# Altium PCB Eros_PCB.PcbDoc
Units mil, origin at the board's own origin, x right, y up, seen from the top; angles counter-clockwise.
Board outline 3205 x 3285 mil, 2 copper layers (Top Layer, Bottom Layer); 38 components, 28 nets, 99 pads, 11 vias.
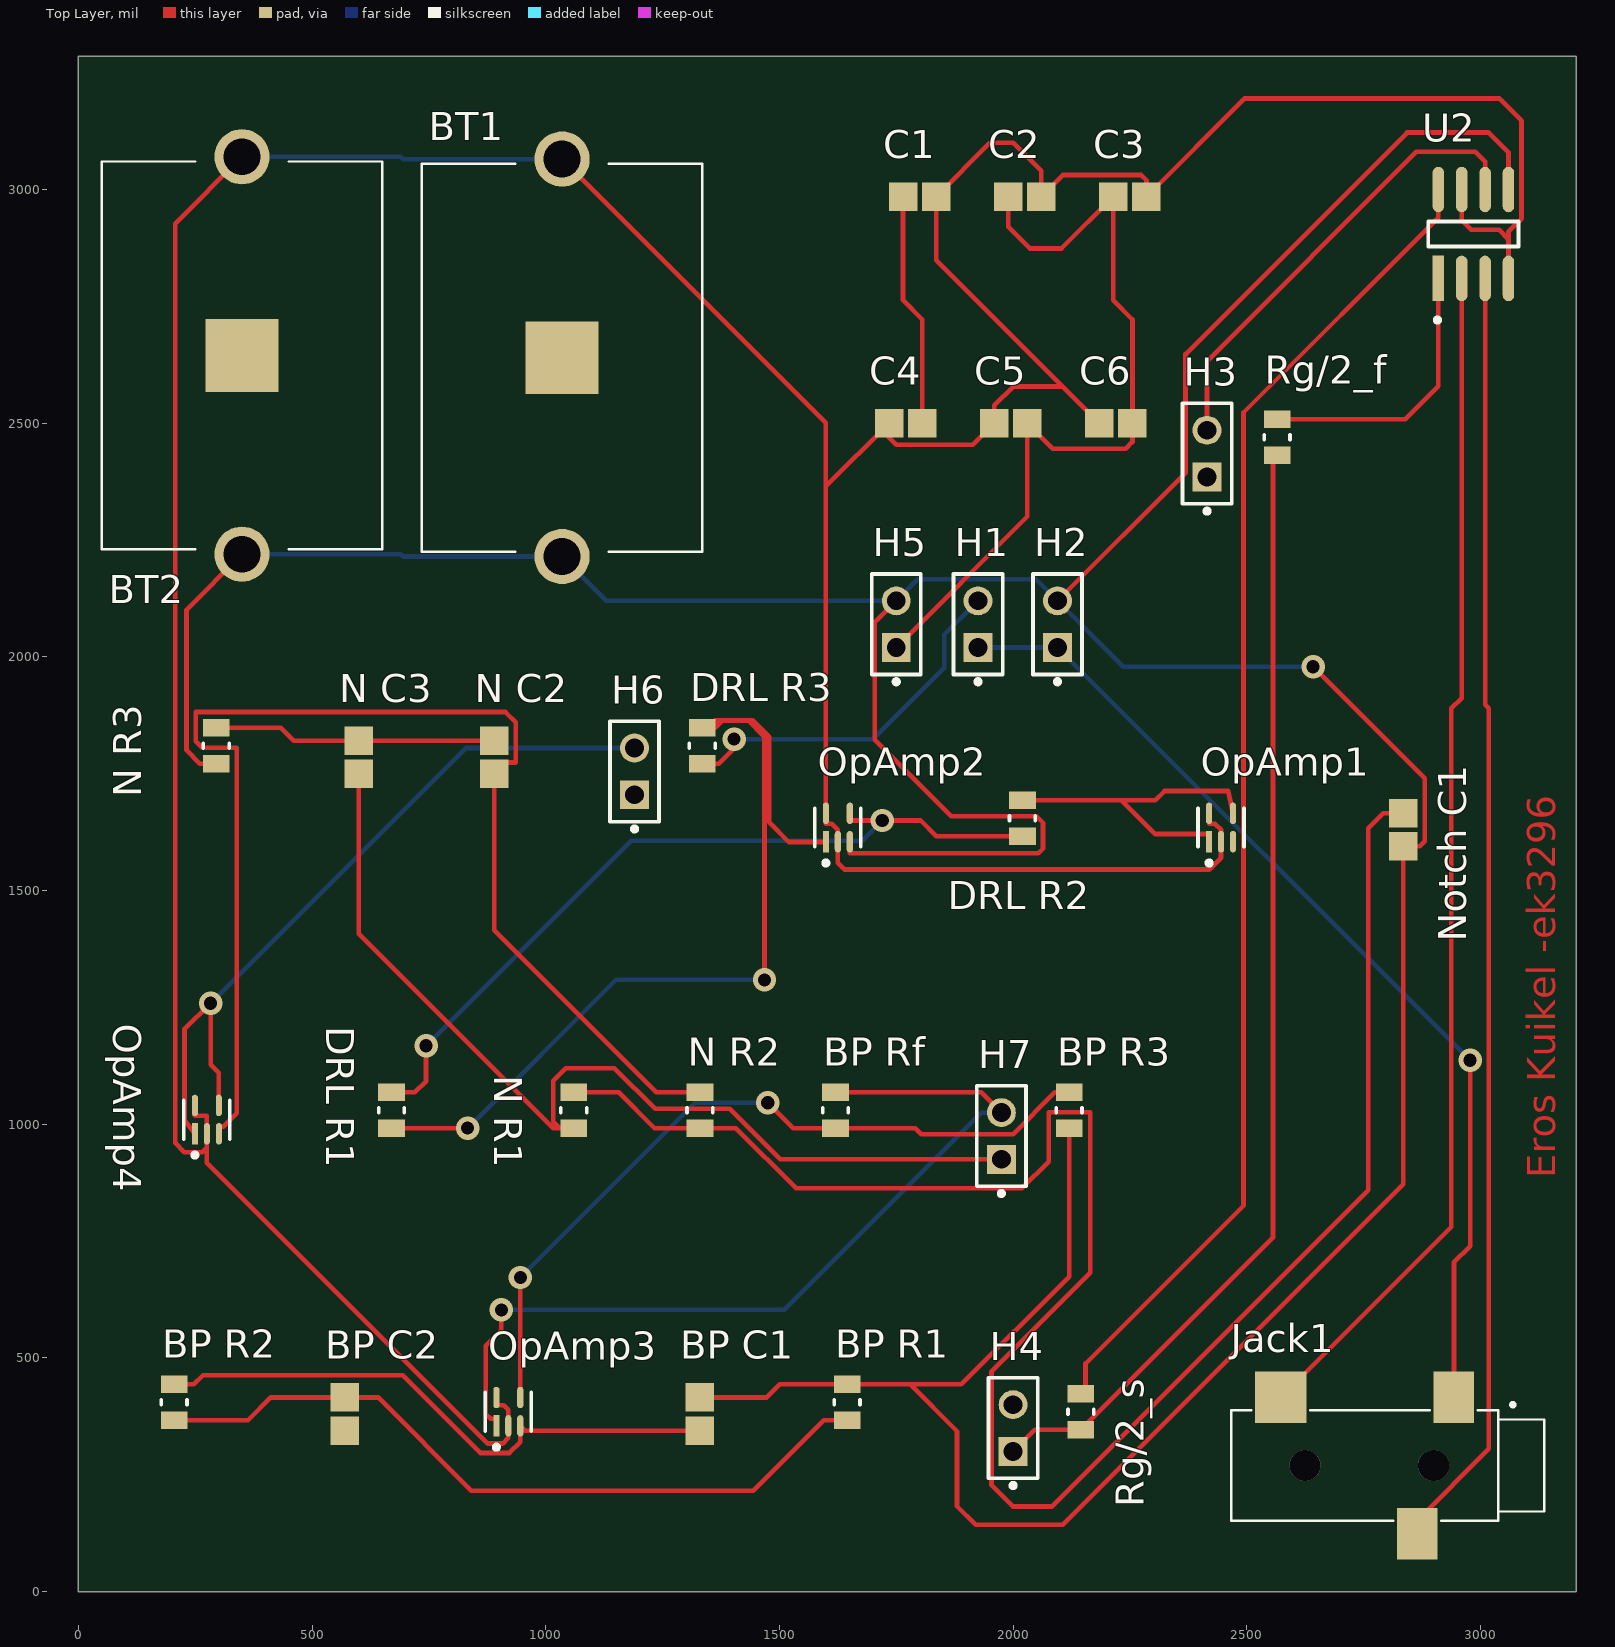
[diagram p0: Top Layer view]
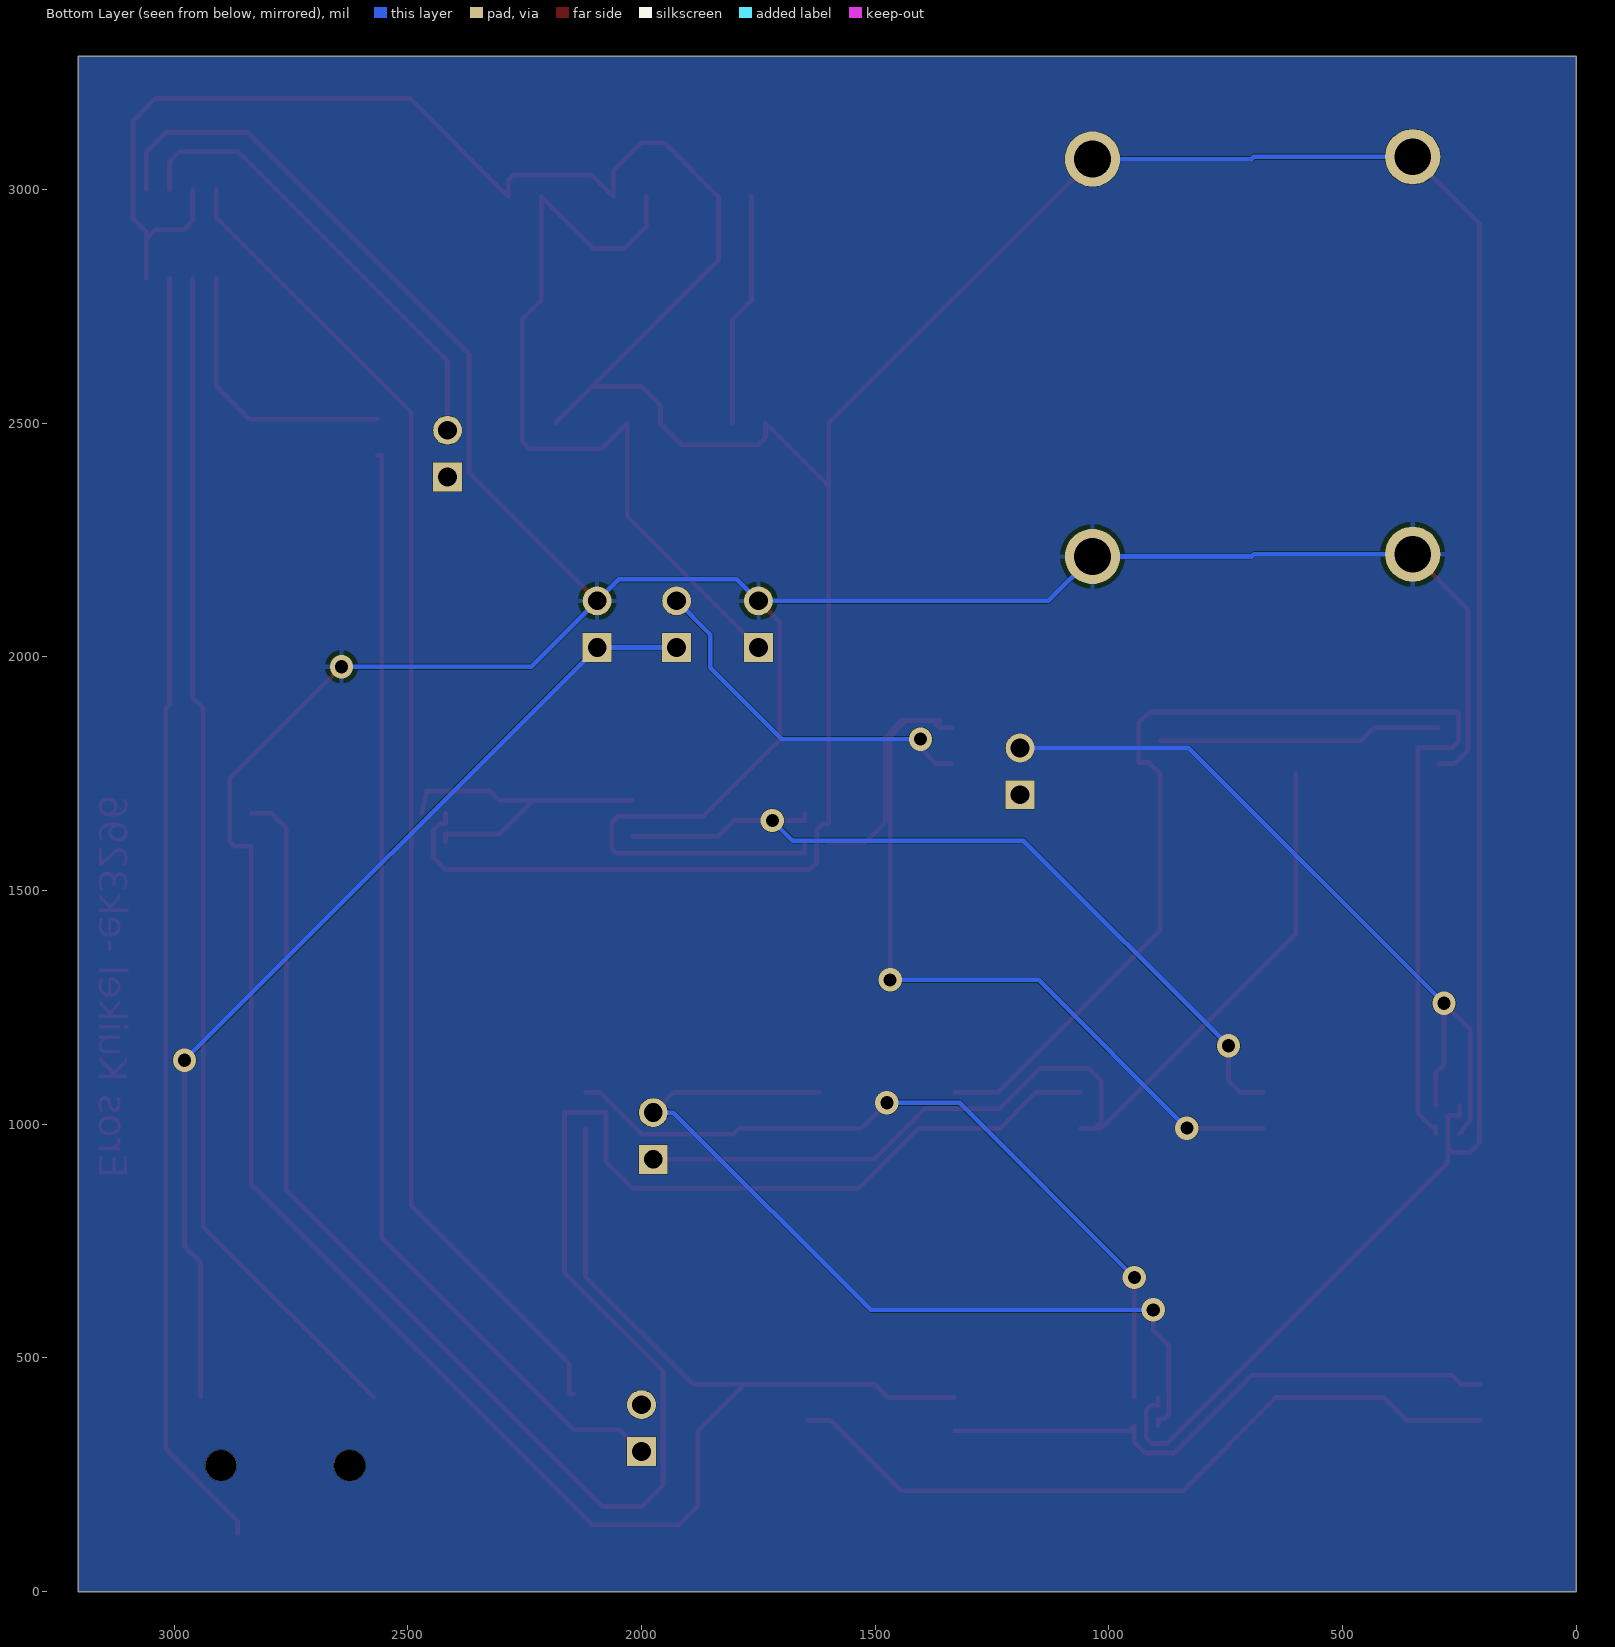
[diagram p1: Bottom Layer view, seen from below]
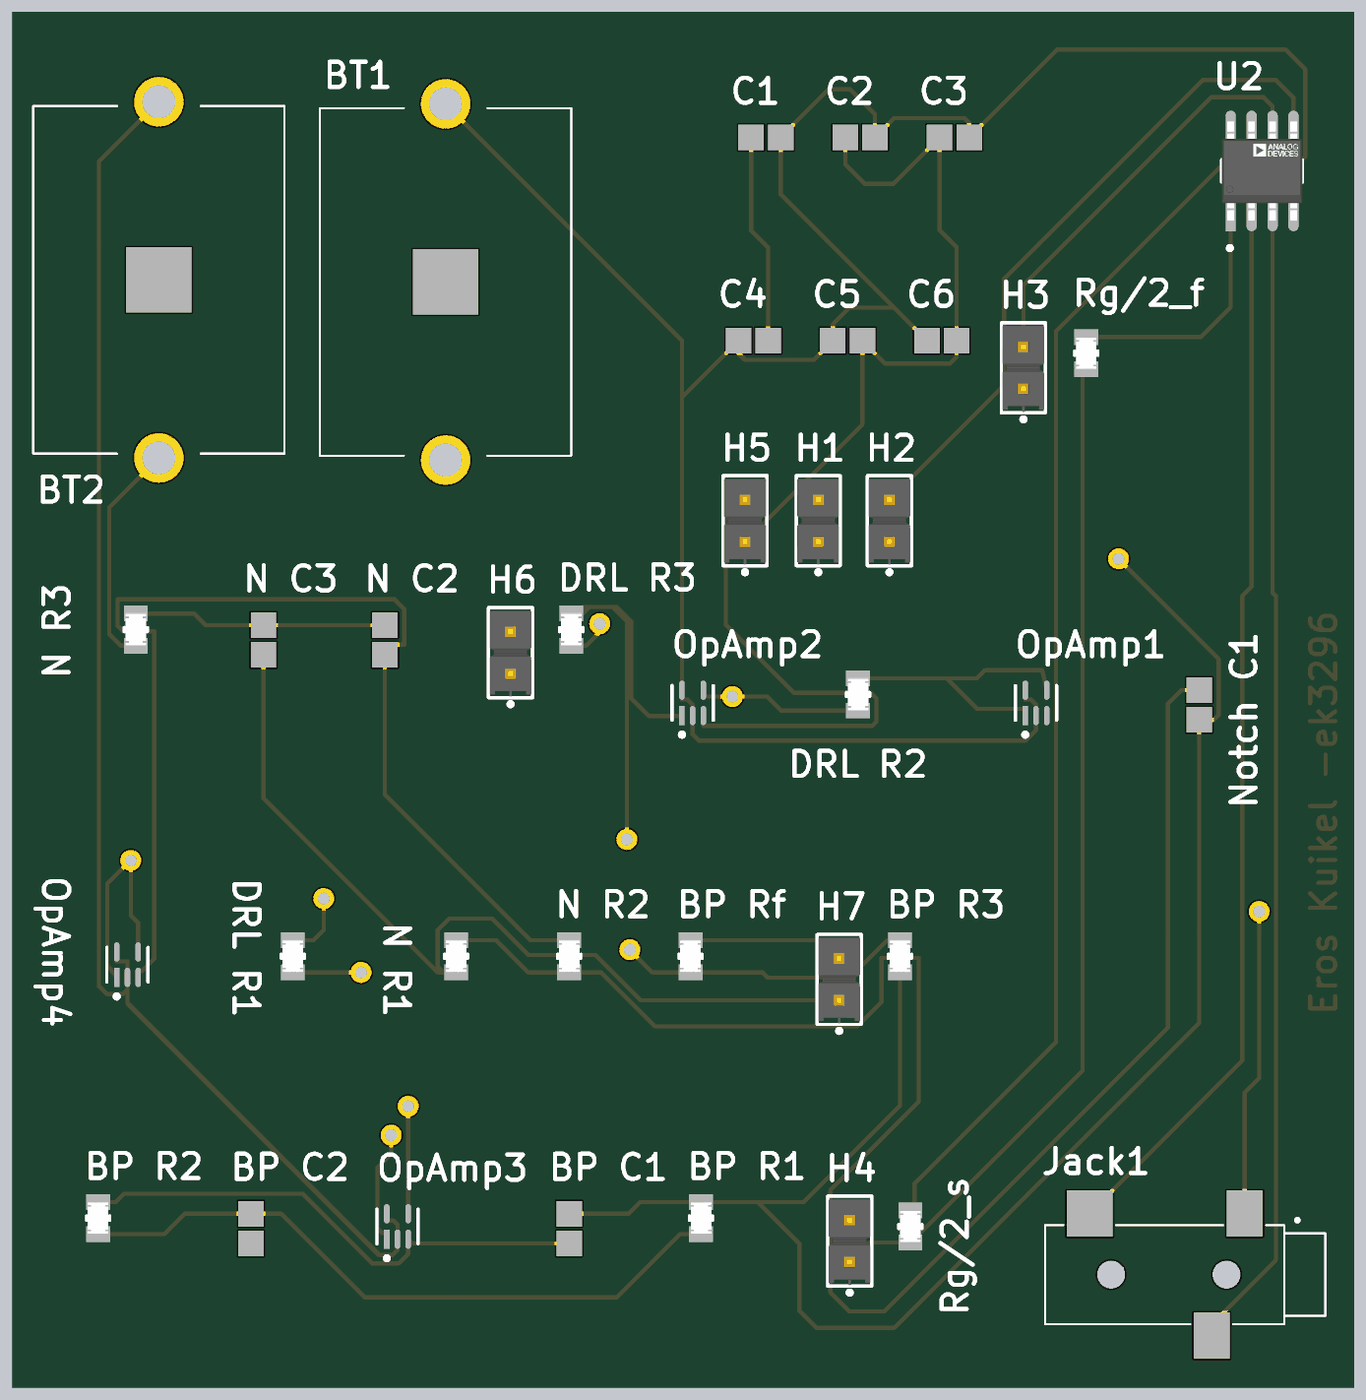
[diagram p2: 3D render of the assembled board from above, using the file's embedded part models]

## Layer stack, top to bottom
Top Solder: solder mask 0.4, Solder Resist, Dk 3.5
Top Layer: signal copper 1.4
Dielectric 1: dielectric 12.6, FR-4, Dk 4.8
Bottom Layer: signal copper 1.4
Bottom Solder: solder mask 0.4, Solder Resist, Dk 3.5

## Board outline
0,0 3205,0 3205,3285 0,3285

## Design rules (kind name [scope] priority, off if disabled: settings)
Clearance [All] p1: gap=0.5 ignorepadtopadclearanceinfootprint=FALSE
MinimumSolderMaskSliver [All] p1: minsoldermaskwidth=0.5
PolygonConnect [All] p1: connectstyle=Relief reliefconductorwidth=10 reliefentries=4 polygonreliefangle="90 Angle" airgapwidth=10
RoutingVias [All] p1: holewidth=28 width=50 viastyle="Through Hole" minholewidth=28 minwidth=50 maxholewidth=28 maxwidth=50
SilkToSolderMaskClearance [IsPad] p1: minsilkscreentomaskgap=5 clearancetoexposedcopper=TRUE
SolderMaskExpansion [All] p1: expansion=4 istentingtop=FALSE
Width [All] p1: maxlimit=10 minlimit=10 preferedwidth=10
28 further rules are at their usual default settings.

## Components (designator, comment, footprint, x,y, rotation, side; value= is the part's Value field where it differs from the comment)
"BP C1" "08052U220GAT2A" CAPC2013X115X51ML20T26 1330,380 r90 top
"BP C2" "08052U220GAT2A" CAPC2013X115X51ML20T26 570,380 r90 top
"BP R1" "CRCW08053K30FKEA" FP-CRCW0805-e3-MFG 1645,405 r90 top
"BP R2" "CRCW08053K30FKEA" FP-CRCW0805-e3-MFG 205,405 r90 top
"BP R3" "CRCW08053K30FKEA" FP-CRCW0805-e3-MFG 2120,1030 r90 top
"BP Rf" "CRCW08053K30FKEA" FP-CRCW0805-e3-MFG 1620,1030 r90 top
BT1 "BK-913-TR" BAT_BK-913-TR 1035,2640 r270 top
BT2 "BK-913-TR" BAT_BK-913-TR 350,2645 r90 top
C1 "08052U220GAT2A" CAPC2013X115X51ML20T26 1800,2985 r0 top
C2 "08052U220GAT2A" CAPC2013X115X51ML20T26 2025,2985 r0 top
C3 "08052U220GAT2A" CAPC2013X115X51ML20T26 2250,2985 r0 top
C4 "08052U220GAT2A" CAPC2013X115X51ML20T26 1770,2500 r0 top
C5 "08052U220GAT2A" CAPC2013X115X51ML20T26 1995,2500 r0 top
C6 "08052U220GAT2A" CAPC2013X115X51ML20T26 2220,2500 r0 top
"DRL R1" "CRCW08053K30FKEA" FP-CRCW0805-e3-MFG 670,1030 r90 top
"DRL R2" "CRCW08053K30FKEA" FP-CRCW0805-e3-MFG 2020,1655 r90 top
"DRL R3" "CRCW08053K30FKEA" FP-CRCW0805-e3-MFG 1335,1810 r90 top
H1 "TSW-102-07-L-S" FP-TSW-102-07-L-S-MFG 1925,2070 r90 top
H2 "TSW-102-07-L-S" FP-TSW-102-07-L-S-MFG 2095,2070 r90 top
H3 "TSW-102-07-L-S" FP-TSW-102-07-L-S-MFG 2415,2435 r90 top
H4 "TSW-102-07-L-S" FP-TSW-102-07-L-S-MFG 2000,350 r90 top
H5 "TSW-102-07-L-S" FP-TSW-102-07-L-S-MFG 1750,2070 r90 top
H6 "TSW-102-07-L-S" FP-TSW-102-07-L-S-MFG 1190,1755 r90 top
H7 "TSW-102-07-L-S" FP-TSW-102-07-L-S-MFG 1975,975 r90 top
Jack1 "SJ-3523-SMT-TR" CUI_SJ-3523-SMT-TR 2900,270 r180 top
"N C2" "08052U220GAT2A" CAPC2013X115X51ML20T26 890,1785 r90 top
"N C3" "08052U220GAT2A" CAPC2013X115X51ML20T26 600,1785 r90 top
"N R1" "CRCW08053K30FKEA" FP-CRCW0805-e3-MFG 1060,1030 r90 top
"N R2" "CRCW08053K30FKEA" FP-CRCW0805-e3-MFG 1330,1030 r90 top
"N R3" "CRCW08053K30FKEA" FP-CRCW0805-e3-MFG 295,1810 r90 top
"Notch C1" "08052U220GAT2A" CAPC2013X115X51ML20T26 2835,1630 r90 top
OpAmp1 "TLV521DCKT" FP-DCK0005A-IPC_C 2445,1635 r90 top
OpAmp2 "TLV521DCKT" FP-DCK0005A-IPC_C 1625,1635 r90 top
OpAmp3 "TLV521DCKT" FP-DCK0005A-IPC_C 920,385 r90 top
OpAmp4 "TLV521DCKT" FP-DCK0005A-IPC_C 275,1010 r90 top
Rg/2_f "CRCW08053K30FKEA" FP-CRCW0805-e3-MFG 2565,2470 r90 top
Rg/2_s "CRCW08053K30FKEA" FP-CRCW0805-e3-MFG 2145,385 r90 top
U2 "AD620ARZ-REEL7" FP-R-8-IPC_A 2985,2905 r90 top

## Footprints (in the part's own frame and the unit in brackets; to place one, negate y for a bottom-side part, rotate by r counter-clockwise, add the part's x,y. Pads: shape width x height; smd on the part's side, far side on the other; paste and mask are expansions set on the pad)
BAT_BK-913-TR [mm]
  round 3 hole 2: 1(-10.8,0) 2(10.8,0)
  rect 3.96x3.96 smd: 3(0,0)
  silkscreen extent -10.54,-7.62 10.54,7.62
CAPC2013X115X51ML20T26 [mm] "Chip Capacitor, 2-Leads, Body 2.01x1.25mm, IPC Low Density"
  rect 1.55x1.55 smd: 1(-0.9,0) 2(0.9,0)
  body extent -1.11,-0.72 1.1,0.72, height 1.15
CUI_SJ-3523-SMT-TR [mm]
  rect 2.2x2.8 smd: 1(-1.1,-3.7) 3(0.9,3.7)
  rect 2.8x2.8 smd: 2(8.3,-3.7)
  round 1.7 hole 1.7 unplated: ""(0,0) ""(7,0)
  silkscreen extent -6,-3.4 11,3
FP-CRCW0805-e3-MFG [mm]
  rect 0.95x1.45 smd paste+0 mask+0: 1(-0.975,0) 2(0.975,0)
  silkscreen extent -0.13,-0.7 0.13,0.7, body extent -1.55,-0.82 1.55,0.82, height 0.25
FP-DCK0005A-IPC_C [mm]
  rect 1.164x0.336 smd paste+0 mask+0: 1(-0.77,0.65)
  rrect100% 1.164x0.336 smd paste+0 mask+0: 2(-0.77,0) 3(-0.77,-0.65) 4(0.77,-0.65) 5(0.77,0.65)
  silkscreen extent -2.05,-1.25 1.05,1.25
FP-R-8-IPC_A [mil]
  rect 97.4x24.49 smd paste+0 mask+0: 1(-95.12,75)
  rrect100% 97.4x24.49 smd paste+0 mask+0: 2(-95.12,25) 3(-95.12,-25) 4(-95.12,-75) 5(95.12,-75) 6(95.12,-25) 7(95.12,25) 8(95.12,75)
  silkscreen extent -189,-96 27,96, body extent -164,-116 164,116, height 10
FP-TSW-102-07-L-S-MFG [mm]
  rect 1.57x1.57 hole 1.02 paste-1000 mask+0: 1(-1.27,0)
  round 1.57 hole 1.02 paste-1000 mask+0: 2(1.27,0)
  silkscreen extent -3.25,-1.34 2.73,1.34, body extent -2.83,-1.44 2.83,1.44, height 0.25

## Part data
"BP C1" "BP C2" C1 C2 C3 C4 C5 C6 "N C2" "N C3" "Notch C1": library part CMP-2007-04866-1, Manufacturer="AVX Interconnect / Elco", Part Number=08052U220GAT2A
"BP R1" "BP R2" "BP R3" "BP Rf" "DRL R1" "DRL R2" "DRL R3" "N R1" "N R2" "N R3" Rg/2_f Rg/2_s: library part CMP-2001-03876-2, "RES Thick Film, 3.3kΩ, 1%, 0.125W, 100ppm/°C, 0805", Case Code (Imperial)=0805, Case Code (Metric)=2012, Max Operating Temperature=155°C, Max Power Dissipation=125mW, Min Operating Temperature=-55°C, Package Quantity=10, Resistance=3.3kR, Temperature Coefficient=100ppm/°C, Tolerance=1%, Voltage Rating=150V, Case/Package=0805, Composition="Thick Film", Contact Plating=Tin, Depth=1.25mm, Features="Automotive AEC-Q200", Height=0.45mm, Lead Free="Lead Free", Length=2mm, Military Standard=Not, Mount="Surface Mount", Number of Terminations=2, Packaging="Tape and Reel", Power Rating=125mW, Radiation Hardening=No, Termination=SMD/SMT, Voltage Rating (DC)=150V, Weight=0.000194oz, Width=1.25mm
BT1 BT2: "Battery Retainer Coin, 20.0mm 1 Cell PC Pin", Package="MSOP-12 MPD", Digi-Key_Part_Number=BK-913-CT-ND, MF="MPD (Memory", MP=BK-913-TR, SnapEDA_Link=https://www.snapeda.com/parts/BK-913-TR/MPD%20(Memory%20Protection%20Devices)/view-part/576523/?ref=snap
H1 H2 H3 H4 H5 H6 H7: library part CMP-02766-001428-1, "CONN HEADER VERT 2POS 2.54MM", Color=Black, Current Rating=7.6A, Max Operating Temperature=125°C, Max Voltage Rating (AC)=550V, Min Operating Temperature=-55°C, Package Quantity=1, Connector Type="Male Pin", Contact Material=Bronze, Contact Mating Length=0.23inch, Contact Plating=Gold, Contact Type="Male Pin", Depth=2.54mm, Gender=Male, Housing Color=Black, Housing Material=Polyester, Lead Free="Lead Free", Length=5.08mm, Max Current Rating=7.6A, Mount="Through Hole", Number of Contacts=2, Number of Positions=2, Number of Rows=1, Orientation=Straight, Packaging=Bulk, Pitch=2.54mm, Radiation Hardening=No, REACH SVHC="No SVHC", RoHS Compliant=Yes, Series=TSW, Termination=Solder, Voltage Rating=550V, Width=2.54mm
Jack1: "<b>Audio Jack Connector</b> 3.5 mm Low Profile Surface Mount Stereo Jack, 3 Pin Right-Angle", Package=None, Availability=Unavailable, MP=SJ-3523-SMT-TR, Price=None
OpAmp1 OpAmp2 OpAmp3 OpAmp4: library part CMP-04895-000072-1, "IC CMOS 1 CIRCUIT SC70-5", Case/Package=SC, Input Bias Current=1pA, Input Offset Voltage (Vos)=100uV, Max Operating Temperature=125°C, Min Operating Temperature=-40°C, Operating Supply Current=350nA, Output Current per Channel=12mA, Bandwidth=6kHz, Gain Bandwidth Product=6kHz, Lead Free="Lead Free", Mount="Surface Mount", Number of Amplifiers=1, Number of Channels=1, Number of Circuits=1, Number of Pins=5, Packaging="Cut Tape", REACH SVHC="No SVHC", Slew Rate=2.5V/µs
U2: library part CMP-09116-000354-1, "IC INST AMP 1 CIRCUIT 8SOIC", Case/Package=SOIC, Dual Supply Voltage=15V, Input Bias Current=500pA, Input Offset Voltage (Vos)=30mV, Input Resistance=10GR, Max Dual Supply Voltage=18V, Max Operating Temperature=125°C, Max Power Dissipation=650mW, Min Dual Supply Voltage=2.3V, Min Operating Temperature=-55°C, Min Supply Voltage=4.6V, Nominal Supply Current=900uA, Operating Supply Current=1.3mA, Output Current per Channel=18mA, Package Quantity=1, Power Supply Rejection Ratio (PSRR)=140dB, -3db Bandwidth=1MHz, Bandwidth=800kHz, Common Mode Rejection Ratio=93dB, Contact Plating=Tin, Lead Free="Contains Lead", Mount="Surface Mount", Number of Channels=1, Number of Circuits=1, Number of Elements=1, Number of Pins=8, Operating Supply Voltage=18V, Packaging="Tape and Reel", Power Dissipation=650mW, Radiation Hardening=No, RoHS Compliant=Yes, Series=-, Slew Rate=1.2V/µs, Supply Current=900uA

## Via types
v1: diameter 50, hole 28, Top Layer to Bottom Layer, 11 vias

## Nets (pads, with @x,y where several pads share a name; then routed paths per layer and width w, separated by ;. In a path a pad name is that pad's centre, name@x,y a point inside that pad or via, vN(x,y) a via of type N, cw(c..) or ccw(c..) an arc to the next point about the centre after c; other vN are vias at no path point)
"Bandpass input": H3.1
GND: "BP C1.2" "BP R1.2" "BP R3.1" "N R3.1" "Notch C1.1" BT1.2 BT2.1 H2.2 H5.2 OpAmp2.3 U2.5 | length 9883
  Top Layer w10: 295,1771.61 259.84,1771.61 231.46,1800 231.46,2101.26 BT2.1 ; 1330,415.43 1473,415.43 1500.95,443.39 1645,443.39 1779.61,443.39 ; OpAmp2.3 1650.59,1580 2054,1580 2064,1590 2064,1645 2050,1659 1868,1659 1704,1823 1704,2074 H5.2 ; H2.2 2369,2394 2369,2648 2843,3122 3018,3122 3060,3080 U2.5 ; 2120,991.61 2120,674 1889.39,443.39 1779.61,443.39 ; v1(2642,1979) 2881,1740 2881,1605.57 2870,1594.57 2835,1594.57 2835,872 2106,143 1920,143 1880,183 1880,343 1779.61,443.39
  Bottom Layer w10: BT2.1 690,2219.8 695,2214.8 BT1.2 1129.8,2120 H5.2 1796,2166 2049,2166 H2.2 2236,1979 v1(2642,1979)
"Input of Bandpass": "BP C2.1"
"Input of DRL": "DRL R3.1" H1.2 | length 787.3
  Top Layer w10: 1335,1771.61 1370,1771.61 1403,1804.61 v1(1403,1824)
  Bottom Layer w10: v1(1403,1824) 1700,1824 1853,1977 1853,2048 H1.2
"Input of Notch": "N C3.1" "N R1.1" H7.1 | length 2132.4
  Top Layer w10: 600,1749.57 600,1407.61 1016,991.61 1030,991.61 ; 1060,991.61 1030,991.61 ; H7.1 1502,925 1394,1033 1234,1033 1147,1120 1043,1120 1016,1093 1016,1005.61 1030,991.61
"NetBP C1_1": "BP C1.1" "BP R2.2" OpAmp3.3 | length 1250.5
  Top Layer w10: 205,443.39 247,443.39 266.61,463 694,463 860.23,296.77 922.36,296.77 945.59,320 OpAmp3.3 955.71,344.57 1330,344.57
"NetBP C2_2": "BP C2.2" "BP R1.1" "BP R2.1" | length 1605.2
  Top Layer w10: 205,366.61 363,366.61 411.82,415.43 570,415.43 641.57,415.43 841,216 1444.39,216 1595,366.61 1645,366.61
"NetBP R3_2": "BP R3.2" "BP Rf.1" OpAmp3.4 | length 1650.9
  Top Layer w10: OpAmp3.4 v1(945.59,672.18) ; v1(1475,1046) 1529.39,991.61 1620,991.61 1791,991.61 1803.61,979 1999.97,979 2089.35,1068.39 2120,1068.39
  Bottom Layer w10: v1(945.59,672.18) 1319.41,1046 v1(1475,1046)
"NetBP Rf_2": "BP Rf.2" H7.2 OpAmp3.1 | length 1896.3
  Top Layer w10: OpAmp3.1 894.41,370 882,370 872,380 872,526 905,559 v1(905,603) ; 1620,1068.39 1931.61,1068.39 H7.2
  Bottom Layer w10: v1(905,603) 1510,603 1932,1025 H7.2
NetC1_1: C1.1 C4.2 | length 501.9
  Top Layer w10: C1.1 1764.57,2762.87 1805.43,2722 C4.2
NetC2_1: C2.1 C3.1 C5.2 C6.2 H5.1 | length 1746.8
  Top Layer w10: H5.1 2030.43,2300.43 C5.2 2085,2445.43 2240.87,2445.43 2255.43,2460 C6.2 2255.43,2722 2214.57,2762.87 C3.1 2103.57,2874 2035.57,2874 1989.57,2920 C2.1
"NetDRL R1_1": "DRL R1.1" "DRL R3.2" OpAmp2.1 | length 2071.9
  Top Layer w10: 670,991.61 v1(833,991.61) ; 1335,1848.39 1362,1848.39 ; v1(1468,1309) 1468,1829 1433,1864 1378.35,1864 ; OpAmp2.1 1599.41,1604 1520,1604 1478,1646 1478,1828.78 1442.74,1864.04 1378.39,1864.04 1378.35,1864 ; 1362,1848.39 1362.74,1848.39 1378.35,1864 ; 1362,1848.39 1362,1864 1378.35,1864
  Bottom Layer w10: v1(833,991.61) 1150.39,1309 v1(1468,1309)
"NetDRL R1_2": "DRL R1.2" "DRL R2.1" OpAmp2.4 | length 1733.8
  Top Layer w10: 670,1068.39 720,1068.39 744,1092.39 v1(744,1168) ; OpAmp2.4 1650.59,1650 v1(1720,1650) 1802.61,1650 1836,1616.61 2020,1616.61
  Bottom Layer w10: v1(744,1168) 1183,1607 1677,1607 v1(1720,1650)
"NetDRL R2_2": "DRL R2.2" OpAmp1.1 OpAmp1.4 | length 731.1
  Top Layer w10: 2020,1693.39 2231.61,1693.39 ; OpAmp1.1 2419.41,1621 2304,1621 2231.61,1693.39 ; OpAmp1.4 2460,1713 2324,1713 2304.39,1693.39 2231.61,1693.39
NetH3_2: H3.2 U2.6 | length 997.1
  Top Layer w10: H3.2 2415,2633 2863,3081 2989,3081 3010,3060 U2.6
NetH4_1: H4.1 Rg/2_f.1 Rg/2_s.1 | length 2428.5
  Top Layer w10: H4.1 2046.61,346.61 Rg/2_s.1 2556,757.61 2556,2431.61 Rg/2_f.1
NetH6_2: H6.2 OpAmp4.1 OpAmp4.4 | length 1669.2
  Top Layer w10: OpAmp4.1 227,1009 227,1203 v1(283,1259) 283,1127.59 300.59,1110 OpAmp4.4
  Bottom Layer w10: v1(283,1259) 829,1805 H6.2
NetJack1_2: Jack1.2 U2.2 | length 2554.4
  Top Layer w10: Jack1.2 2937.8,780.24 2937.8,1889.74 2960,1911.94 U2.2
NetJack1_3: Jack1.3 U2.3 | length 2752.4
  Top Layer w10: Jack1.3 2864.57,152 3018,305.43 3018,1889.74 3010,1897.74 U2.3
"NetN C2_1": "N C2.1" "N R2.2" OpAmp4.3 | length 2757.1
  Top Layer w10: OpAmp4.3 300.59,995 310,995 339,1024 339,1806 265.46,1806 251.46,1820 251.46,1882.09 913.91,1882.09 936,1860 936,1774 914.43,1774 890,1749.57 890,1415 1236.61,1068.39 1330,1068.39
"NetN C2_2": "N C2.2" "N C3.2" "N R3.2" | length 606.6
  Top Layer w10: 295,1848.39 433,1848.39 460.95,1820.43 600,1820.43 890,1820.43
"NetN R1_2": "N R1.2" "N R2.1" "Notch C1.2" | length 4173
  Top Layer w10: 1060,1068.39 1156,1068.39 1232.77,991.61 1330,991.61 1407,991.61 1535.61,863 2019,863 2076,920 2076,1026 2165,1026 2165,682.6 1954,471.6 1954,228 2000,182 2083,182 2760,859 2760,1633 2792.43,1665.43 2835,1665.43
NetRg/2_f_2: Rg/2_f.2 U2.1 | length 605.1
  Top Layer w10: Rg/2_f.2 2839.39,2508.39 2910,2579 U2.1
NetRg/2_s_2: Rg/2_s.2 U2.8 | length 2899.5
  Top Layer w10: Rg/2_s.2 2155,423.39 2155,488 2493,826 2493,2523 2910,2940 U2.8
"Ouput of DRL": H4.2
"Output of DRL": OpAmp1.3
"Right Leg": H1.1 H2.1 Jack1.1 | length 2154.5
  Top Layer w10: Jack1.1 2943.31,704.31 2978,739 v1(2978,1137)
  Bottom Layer w10: H1.1 H2.1 v1(2978,1137)
Vcc+: BT1.1 BT2.2 C1.2 C2.2 C3.2 C4.1 C5.1 C6.1 OpAmp1.2 OpAmp1.5 OpAmp2.2 OpAmp2.5 OpAmp3.2 OpAmp3.5 OpAmp4.2 OpAmp4.5 U2.4 U2.7 | length 10176.8
  Top Layer w10: OpAmp4.5 249.41,1018 275,1018 OpAmp4.2 275,950 ; BT2.2 207,2927.2 207,960 227,940 265,940 275,950 ; OpAmp3.5 894.41,399 910,399 920,389 OpAmp3.2 920,329 907.77,316.77 876.23,316.77 275,918 275,950 ; BT1.1 1599.41,2500.79 1599.41,2364.84 ; C6.1 2106,2578.57 ; OpAmp1.5 2419.41,1643 2432,1643 2445,1630 OpAmp1.2 2445,1570 2420,1545 1640,1545 1625,1560 OpAmp2.2 1625,1630 1612,1643 1599.41,1643 OpAmp2.5 1599.41,2364.84 ; U2.7 2960,2934 2980,2914 3040,2914 3060,2894 ; U2.4 3060,2894 ; 1599.41,2364.84 C4.1 1734.57,2469.43 1750,2454 1913.57,2454 C5.1 1959.57,2538.13 2000,2578.57 2106,2578.57 ; 2106,2578.57 1835.43,2849.13 C1.2 1950.43,3100 2000.43,3100 2060.43,3040 C2.2 2106.43,3031 2274.43,3031 2285.43,3020 C3.2 2495.43,3195 3040,3195 3088,3147 3088,2938 3060,2910 3060,2894
  Bottom Layer w10: BT2.2 690,3070.2 695,3065.2 BT1.1
pads on no net: BT1.3 BT2.3 H6.1 Jack1.

## Polygon pours and split planes (outlines as drawn)
GND on Bottom Layer "GND_L02_P002" (solid, pour order 2): 0,0 3205,0 3205,3285 0,3285

## Other copper
Top Layer:
  text "Eros Kuikel -ek3296" at 3160,885 h60 r90